# EAGLE board CT_schematic (EAGLE 7.6.0)

Size 100 x 80 mm. Coordinates in mm from the lower left corner, seen from the top.
Outline: 0,0 100,0 100,80 0,80 0,0
Copper layers (1*16): Top 0.035mm / dielectric 1.5mm / Bottom 0.035mm
Design rules "default": minimum track width 10mil, minimum drill 24mil, track to track 8mil, track to pad 8mil, pad to pad 8mil, via to via 8mil, smd to smd 8mil, copper to edge 40mil, drill to drill 8mil, minimum pad ring 10mil, minimum via ring 8mil, stop-mask expansion 4mil, vias tented up to drill 0mil, thermal gap 10mil

## Footprints (pad centres in the part's own frame; a part is rotated, then mirrored left to right if it is on the bottom)
C0603 = smd 0.8 x 0.8: 1 -0.762,0; 2 0.762,0
C0402 = smd 0.5 x 0.5: 1 -0.508,0; 2 0.508,0
C1210 = smd 1.2 x 2.5: 1 -1.524,0; 2 1.524,0
C1206 = smd 1.3 x 1.6: 1 -1.524,0; 2 1.524,0
EXV-9H = smd 3.505 x 1.676: 1 -2.857,0; 2 2.857,0
L0603 = smd 0.8 x 0.8: 1 -0.762,0; 2 0.762,0
R0603 = smd 0.8 x 0.8: 1 -0.762,0; 2 0.762,0
DR1040 = smd 1.6 x 3.2: 1 -4.458,0; 2 4.458,0
PJ-037B_PACKAGE = drill 3.7 square: 1 12,0 | drill 3.2 square: 2 6,0
LQFP100 = smd 0.3 x 1.2: 1 -6,-7.75; 2 -5.5,-7.75; 3 -5,-7.75; 4 -4.5,-7.75; 5 -4,-7.75; 6 -3.5,-7.75; 7 -3,-7.75; 8 -2.5,-7.75; 9 -2,-7.75; 10 -1.5,-7.75; 11 -1,-7.75; 12 -0.5,-7.75; 13 0,-7.75; 14 0.5,-7.75; 15 1,-7.75; 16 1.5,-7.75; 17 2,-7.75; 18 2.5,-7.75; 19 3,-7.75; 20 3.5,-7.75; 21 4,-7.75; 22 4.5,-7.75; 23 5,-7.75; 24 5.5,-7.75; 25 6,-7.75; 51 6,7.75; 52 5.5,7.75; 53 5,7.75; 54 4.5,7.75; 55 4,7.75; 56 3.5,7.75; 57 3,7.75; 58 2.5,7.75; 59 2,7.75; 60 1.5,7.75; 61 1,7.75; 62 0.5,7.75; 63 0,7.75; 64 -0.5,7.75; 65 -1,7.75; 66 -1.5,7.75; 67 -2,7.75; 68 -2.5,7.75; 69 -3,7.75; 70 -3.5,7.75; 71 -4,7.75; 72 -4.5,7.75; 73 -5,7.75; 74 -5.5,7.75; 75 -6,7.75 | smd 1.2 x 0.3: 26 7.75,-6; 27 7.75,-5.5; 28 7.75,-5; 29 7.75,-4.5; 30 7.75,-4; 31 7.75,-3.5; 32 7.75,-3; 33 7.75,-2.5; 34 7.75,-2; 35 7.75,-1.5; 36 7.75,-1; 37 7.75,-0.5; 38 7.75,0; 39 7.75,0.5; 40 7.75,1; 41 7.75,1.5; 42 7.75,2; 43 7.75,2.5; 44 7.75,3; 45 7.75,3.5; 46 7.75,4; 47 7.75,4.5; 48 7.75,5; 49 7.75,5.5; 50 7.75,6; 76 -7.75,6; 77 -7.75,5.5; 78 -7.75,5; 79 -7.75,4.5; 80 -7.75,4; 81 -7.75,3.5; 82 -7.75,3; 83 -7.75,2.5; 84 -7.75,2; 85 -7.75,1.5; 86 -7.75,1; 87 -7.75,0.5; 88 -7.75,0; 89 -7.75,-0.5; 90 -7.75,-1; 91 -7.75,-1.5; 92 -7.75,-2; 93 -7.75,-2.5; 94 -7.75,-3; 95 -7.75,-3.5; 96 -7.75,-4; 97 -7.75,-4.5; 98 -7.75,-5; 99 -7.75,-5.5; 100 -7.75,-6
ARDUCAM = drill 1 pad 1.8 square: 1 0,0 | drill 1 pad 1.8: 2 0,2.54; 3 2.54,0; 4 2.54,2.54; 5 5.08,0; 6 5.08,2.54; 7 7.62,0; 8 7.62,2.54; 9 10.16,0; 10 10.16,2.54; 11 12.7,0; 12 12.7,2.54; 13 15.24,0; 14 15.24,2.54; 15 17.78,0; 16 17.78,2.54; 17 20.32,0; 18 20.32,2.54; 19 22.86,0; 20 22.86,2.54
AT24C02D = smd 1.6 x 0.6: 1 -2.475,1.905 | smd 1.55 x 0.6: 2 -2.475,0.635; 3 -2.475,-0.635; 4 -2.475,-1.905; 5 2.475,-1.905; 6 2.475,-0.635; 7 2.475,0.635; 8 2.475,1.905
SOT-23-8 = smd 0.4 x 1.2: 1 -0.975,-1.3; 2 -0.325,-1.3; 3 0.325,-1.3; 4 0.975,-1.3; 5 0.975,1.3; 6 0.325,1.3; 7 -0.325,1.3; 8 -0.975,1.3
182-009-MALE = drill 1.194 pad 1.524 octagon: 1 -5.537,10.923; 2 -2.769,10.923; 3 0,10.923; 4 2.769,10.923; 5 5.537,10.923; 6 -4.153,8.08; 7 -1.384,8.08; 8 1.384,8.08; 9 4.153,8.08 | hole 3.048: -12.446,9.501; 12.446,9.501
RTL8201FL-VB-CG = smd 0.27 x 1: 1 0,0; 2 0.5,0; 3 1,0; 4 1.5,0; 5 2,0; 6 2.5,0; 7 3,0; 8 3.5,0; 9 4,0; 10 4.5,0; 11 5,0; 12 5.5,0; 25 5.5,8; 26 5,8; 27 4.5,8; 28 4,8; 29 3.5,8; 30 3,8; 31 2.5,8; 32 2,8; 33 1.5,8; 34 1,8; 35 0.5,8; 36 0,8 | smd 1 x 0.27: 13 6.75,1.25; 14 6.75,1.75; 15 6.75,2.25; 16 6.75,2.75; 17 6.75,3.25; 18 6.75,3.75; 19 6.75,4.25; 20 6.75,4.75; 21 6.75,5.25; 22 6.75,5.75; 23 6.75,6.25; 24 6.75,6.75; 37 -1.25,6.75; 38 -1.25,6.25; 39 -1.25,5.75; 40 -1.25,5.25; 41 -1.25,4.75; 42 -1.25,4.25; 43 -1.25,3.75; 44 -1.25,3.25; 45 -1.25,2.75; 46 -1.25,2.25; 47 -1.25,1.75; 48 -1.25,1.25
7498011122R = smd 0.71 x 2.29: 1 -3.545,-3.18; 2 -2.525,-3.18; 3 -1.505,-3.18; 4 -0.485,-3.18; 5 0.535,-3.18; 6 1.555,-3.18; 8 3.595,-3.18; 9 5.635,-3.18; 10 6.655,-3.18; 11 -6.605,-3.18; 12 -5.585,-3.18 | smd 1.4 x 2.54: 13 -8.51,10.2; 14 8.51,10.2 | hole 1.4: -3.5,0; 3.5,0
QFN65P400X400X100-17N = smd 1.016 x 0.356: 1 -1.803,0.965; 2 -1.803,0.33; 3 -1.803,-0.33; 4 -1.803,-0.965; 9 1.803,-0.965; 10 1.803,-0.33; 11 1.803,0.33; 12 1.803,0.965 | smd 0.356 x 1.016: 5 -0.965,-1.803; 6 -0.33,-1.803; 7 0.33,-1.803; 8 0.965,-1.803; 13 0.965,1.803; 14 0.33,1.803; 15 -0.33,1.803; 16 -0.965,1.803 | smd 2.108 x 2.108: 17 0,0
HTSS-105-01-G-D = drill 1 pad 1.8 square: 1 0,0 | drill 1 pad 1.8: 2 0,2.54; 3 2.54,0; 4 2.54,2.54; 5 5.08,0; 6 5.08,2.54; 7 7.62,0; 8 7.62,2.54; 9 10.16,0; 10 10.16,2.54
ABLS-25.000MHZ-B2F-T = smd 5.6 x 2.8: 1 -3.81,0; 2 5.69,0
ASEK = smd 1.4 x 1: 1 -1.1,-0.8; 2 1.1,-0.8; 3 1.1,0.8; 4 -1.1,0.8
ASFL1 = smd 1.7 x 1.5: 1 -1.27,-1.1; 2 1.27,-1.1; 3 1.27,1.1; 4 -1.27,1.1
IDT74FCT38072 = smd 0.51 x 1: 1 0,0; 2 1.27,0; 3 2.54,0; 4 3.81,0; 5 3.81,4.95; 6 2.54,4.95; 7 1.27,4.95; 8 0,4.95
HTSSOP14 = smd 1.676 x 0.356: 1 -2.8,1.95; 2 -2.8,1.3; 3 -2.8,0.65; 4 -2.8,0; 5 -2.8,-0.65; 6 -2.8,-1.3; 7 -2.8,-1.95; 8 2.8,-1.95; 9 2.8,-1.3; 10 2.8,-0.65; 11 2.8,0; 12 2.8,0.65; 13 2.8,1.3; 14 2.8,1.95 | smd 3 x 5: 15 0,0 | drill 0.4 pad 0.45: P$1 -0.75,1.5; P$2 0.75,1.5; P$3 -0.75,0; P$4 0.8,0; P$5 -0.75,-1.5; P$6 0.9,-1.5
SON-6 = smd 0.55 x 0.3: 1 -0.355,0.5 | smd 0.52 x 0.3: 2 -0.37,0; 3 -0.37,-0.5; 4 0.37,-0.5; 5 0.37,0; 6 0.37,0.5
SW_4-1437565-2 = smd 1.4 x 2.1: 1 -2.23,4.55; 2 -2.23,-4.55; 3 2.23,4.55; 4 2.23,-4.55
LGM67K-G1J2-24-Z = smd 0.8 x 1.4: A -2,0; C 0,0
NC7SZ125M5X = smd 1.3 x 0.7: 1 -1.3,0.95; 2 -1.3,0; 3 -1.3,-0.95; 4 1.3,-0.95; 5 1.3,0.95

## Placement (x,y rotation side)
C1  1e-06  [C0603]  -15.24,86.36 0 top  (outside the outline)
C2  1e-07  [C0603]  -19.05,86.36 0 top  (outside the outline)
C3  1e-07  [C0603]  -22.86,86.36 0 top  (outside the outline)
C4  1e-07  [C0603]  -26.67,86.36 0 top  (outside the outline)
C5  1e-07  [C0603]  -30.48,86.36 0 top  (outside the outline)
C6  1e-07  [C0603]  -34.29,86.36 0 top  (outside the outline)
C7  1e-07  [C0603]  -38.1,86.36 0 top  (outside the outline)
C8  4.7e-06  [C0603]  -80.01,81.28 0 top  (outside the outline)
C9  2.2e-06  [C0603]  -83.82,81.28 0 top  (outside the outline)
C10  2.2e-06  [C0603]  -87.63,81.28 0 top  (outside the outline)
C11  1e-08  [C0603]  -41.91,86.36 0 top  (outside the outline)
C12  1e-06  [C0603]  -45.72,86.36 0 top  (outside the outline)
C13  1e-06  [C0603]  -49.53,86.36 0 top  (outside the outline)
C14  1e-08  [C0402]  -77.47,91.44 0 top  (outside the outline)
C15  1e-07  [C0402]  -81.28,91.44 0 top  (outside the outline)
C16  2.2e-08  [C0402]  -62.23,91.44 0 top  (outside the outline)
C17  1e-06  [C0603]  -53.34,86.36 0 top  (outside the outline)
C18  1e-07  [C0402]  -85.09,91.44 0 top  (outside the outline)
C19  1e-08  [C0402]  -88.9,91.44 0 top  (outside the outline)
C20  1e-06  [C0603]  -57.15,86.36 0 top  (outside the outline)
C21  1e-07  [C0402]  -15.24,96.52 0 top  (outside the outline)
C22  1e-08  [C0402]  -19.05,96.52 0 top  (outside the outline)
C23  1e-07  [C0402]  -22.86,96.52 0 top  (outside the outline)
C24  1e-07  [C0402]  -26.67,96.52 0 top  (outside the outline)
C25  2.7e-11  [C0402]  -66.04,91.44 0 top  (outside the outline)
C26  2.7e-11  [C0402]  -69.85,91.44 0 top  (outside the outline)
C27  1e-07  [C0402]  -30.48,96.52 0 top  (outside the outline)
C28  1e-06  [C0603]  -60.96,86.36 0 top  (outside the outline)
C29  1e-08  [C0402]  -34.29,96.52 0 top  (outside the outline)
C30  1e-08  [C0402]  -38.1,96.52 0 top  (outside the outline)
C31  1e-08  [C0402]  -41.91,96.52 0 top  (outside the outline)
C32  1e-06  [C0603]  -64.77,86.36 0 top  (outside the outline)
C33  3.3e-09  [C0402]  -73.66,91.44 0 top  (outside the outline)
C34  1e-07  [C0402]  -45.72,96.52 0 top  (outside the outline)
C35  2.2e-05  [C1210]  -88.9,67.31 0 top  (outside the outline)
C36  2.2e-05  [C1210]  -16.51,74.93 0 top  (outside the outline)
C37  1e-05  [C1206]  -22.86,74.93 0 top  (outside the outline)
C38  1e-05  [C1206]  -29.21,74.93 0 top  (outside the outline)
C39  1e-07  [C0402]  -49.53,96.52 0 top  (outside the outline)
C40  0.0001  [EXV-9H]  -55.88,59.69 0 top  (outside the outline)
C41  0.0001  [EXV-9H]  -67.31,59.69 0 top  (outside the outline)
C42  1e-08  [C0402]  -53.34,96.52 0 top  (outside the outline)
C43  1e-08  [C0402]  -57.15,96.52 0 top  (outside the outline)
C44  1e-08  [C0402]  -60.96,96.52 0 top  (outside the outline)
F1  240.0  [L0603]  -68.58,86.36 0 top  (outside the outline)
I1  97.0  [R0603]  -72.39,86.36 0 top  (outside the outline)
I5  5.2e-06  [DR1040]  -19.05,49.53 0 top  (outside the outline)
J1  PJ-037B  [PJ-037B_PACKAGE]  -71.12,35.56 0 top  (outside the outline)
R2  1000.0  [R0603]  -76.2,86.36 0 top  (outside the outline)
R4  4700.0  [R0603]  -80.01,86.36 0 top  (outside the outline)
R5  4700.0  [R0603]  -83.82,86.36 0 top  (outside the outline)
R6  4700.0  [R0603]  -87.63,86.36 0 top  (outside the outline)
R7  2200.0  [R0603]  -15.24,91.44 0 top  (outside the outline)
R8  2200.0  [R0603]  -19.05,91.44 0 top  (outside the outline)
R9  2200.0  [R0603]  -22.86,91.44 0 top  (outside the outline)
R10  2200.0  [R0603]  -26.67,91.44 0 top  (outside the outline)
R11  10000.0  [R0603]  -77.47,74.93 0 top  (outside the outline)
R12  10000.0  [R0603]  -82.55,74.93 0 top  (outside the outline)
R13  10000.0  [R0603]  -87.63,74.93 0 top  (outside the outline)
R14  10000.0  [R0603]  -15.24,81.28 0 top  (outside the outline)
R15  10000.0  [R0603]  -20.32,81.28 0 top  (outside the outline)
R16  120.0  [R0603]  -30.48,91.44 0 top  (outside the outline)
R17  0.1  [R0603]  -34.29,91.44 0 top  (outside the outline)
R18  0.1  [R0603]  -38.1,91.44 0 top  (outside the outline)
R19  200.0  [R0603]  -41.91,91.44 0 top  (outside the outline)
R20  200.0  [R0603]  -45.72,91.44 0 top  (outside the outline)
R21  2490.0  [R0603]  -49.53,91.44 0 top  (outside the outline)
R22  4700.0  [R0603]  -53.34,91.44 0 top  (outside the outline)
R23  10000.0  [R0603]  -25.4,81.28 0 top  (outside the outline)
R24  10000.0  [R0603]  -30.48,81.28 0 top  (outside the outline)
R25  10000.0  [R0603]  -35.56,81.28 0 top  (outside the outline)
R26  10000.0  [R0603]  -40.64,81.28 0 top  (outside the outline)
R27  10000.0  [R0603]  -45.72,81.28 0 top  (outside the outline)
R28  10000.0  [R0603]  -50.8,81.28 0 top  (outside the outline)
R29  10000.0  [R0603]  -55.88,81.28 0 top  (outside the outline)
R30  10000.0  [R0603]  -60.96,81.28 0 top  (outside the outline)
R31  71007.101651032  [R0603]  -62.23,74.93 0 top  (outside the outline)
R32  22000.0  [R0603]  -66.04,81.28 0 top  (outside the outline)
R33  10000.0  [R0603]  -71.12,81.28 0 top  (outside the outline)
R34  10000.0  [R0603]  -76.2,81.28 0 top  (outside the outline)
R35  9100.0  [R0603]  -57.15,91.44 0 top  (outside the outline)
R36  680000.0  [R0603]  -67.31,74.93 0 top  (outside the outline)
R37  120000.0  [R0603]  -72.39,74.93 0 top  (outside the outline)
U1  STM32F745VET6  [LQFP100]  -82.55,8.89 0 top  (outside the outline)
U2  arducam_ov2640  [ARDUCAM]  -60.96,66.04 0 top  (outside the outline)
U3  AT24C02D-SSHM-T  [AT24C02D]  -55.88,48.26 0 top  (outside the outline)
U4  MAX3051EKA+T  [SOT-23-8]  -34.29,74.93 0 top  (outside the outline)
U5  182-009-113R531  [182-009-MALE]  -55.88,6.35 0 top  (outside the outline)
U6  RTL8201FL-VB-CG  [RTL8201FL-VB-CG]  -54.61,31.75 0 top  (outside the outline)
U7  7498011122R  [7498011122R]  -22.86,7.62 0 top  (outside the outline)
U8  TSC2008TRGVRQ1  [QFN65P400X400X100-17N]  -35.56,35.56 0 top  (outside the outline)
U9  HTSS-105-01-G-D  [HTSS-105-01-G-D]  -39.37,46.99 0 top  (outside the outline)
U10  ABLS-25.000MHZ-B2F-T  [ABLS-25.000MHZ-B2F-T]  -26.67,68.58 0 top  (outside the outline)
U11  ASEK-32.768KHz-ECST  [ASEK]  -46.99,59.69 0 top  (outside the outline)
U12  ASFL1-25MHZ-NCS  [ASFL1]  -73.66,48.26 0 top  (outside the outline)
U13  idt74fct38072  [IDT74FCT38072]  -29.21,57.15 0 top  (outside the outline)
U14  tps54325PWP  [HTSSOP14]  -68.58,67.31 0 top  (outside the outline)
U15  TPS3895ADRYR  [SON-6]  -63.5,95.25 0 top  (outside the outline)
U16  4-1437565-2  [SW_4-1437565-2]  -87.63,34.29 0 top  (outside the outline)
U17  Q65110A2395  [LGM67K-G1J2-24-Z]  -77.47,67.31 0 top  (outside the outline)
U18  nc7sz125m5x  [NC7SZ125M5X]  -39.37,74.93 0 top  (outside the outline)
U19  nc7sz125m5x  [NC7SZ125M5X]  -45.72,74.93 0 top  (outside the outline)
U20  nc7sz125m5x  [NC7SZ125M5X]  -52.07,74.93 0 top  (outside the outline)

## Library data of the parts
C1-C44 F1 I1 I5 J1 R2 R4-R37 U1-U20 = circuit_tree

## Nets
CLK_CRYSTAL_U6_42: C26.1 U6.42 U10.1
CLK_CRYSTAL_U6_43: C25.1 U6.43 U10.2
CLK_U1_8: U1.8 U11.3
CLK_U1_12: U1.12 U13.6
CLK_U2_8: U2.8 U13.7
CLK_U13_3: U12.3 U13.3
GND: C1.2 C2.2 C3.2 C4.2 C5.2 C6.2 C7.2 C8.2 C9.2 C10.2 C11.2 C12.2 C13.2 C14.2 C15.2 C16.2 C17.2 C18.2 C19.2 C20.2 C21.2 C22.2 C23.2 C24.2 C25.2 C26.2 C27.2 C28.2 C29.2 C30.2 C31.2 C32.2 C33.2 C35.2 C36.2 C37.2 C38.2 C39.2 C40.2 C41.2 C42.2 C43.2 C44.2 J1.2 R2.2 R11.2 R12.2 R14.2 R15.2 R17.2 R18.2 R21.2 R23.2 R24.2 R26.2 R32.2 R35.2 R37.2 U1.10 U1.19 U1.26 U1.49 U1.74 U1.99 U2.2 U2.20 U3.4 U4.2 U4.8 U5.5 U6.7 U6.20 U6.33 U6.47 U7.9 U8.10 U8.12 U8.17 U9.9 U11.2 U12.2 U13.4 U13.5 U13.8 U14.5 U14.8 U14.9 U14.15 U15.2 U17.C U18.1 U18.3 U19.1 U19.3 U20.1 U20.3
NET_U1_14: R5.1 U1.14 U19.4
NET_U1_16: R9.1 U1.16 U6.30
NET_U1_21: C11.1 C12.1 F1.1 U1.20 U1.21
NET_U1_24: R10.1 U1.24 U6.31
NET_U1_48: C9.1 U1.48
NET_U1_73: C10.1 U1.73
NET_U1_92: R7.1 U1.92 U3.6
NET_U1_94: R11.1 U1.94
NET_U1_96: R8.1 U1.96 U3.5
NET_U1_97: U17.A
NET_U1_98: U16.3 U16.4
NET_U2_19: R6.1 U2.19 U20.4
NET_U3_1: R13.1 U3.1
NET_U3_2: R14.1 U3.2
NET_U3_3: R15.1 U3.3
NET_U3_7: R12.1 U3.7
NET_U4_6: R16.2 U4.6
NET_U5_2: R16.2 U4.6 U5.2
NET_U5_3: R16.1 U4.7 U5.3
NET_U6_6: C17.1 C18.1 C19.1 I1.1 U6.6 U6.41
NET_U6_10: R26.1 U6.10
NET_U6_28: U6.28
NET_U6_29: R4.1 U6.29 U18.4
NET_U6_32: R22.1 U6.32
NET_U6_34: R24.1 U6.34
NET_U6_35: R25.1 U6.35
NET_U6_40: C24.1 U6.40
NET_U6_46: R21.1 U6.46
NET_U6_48: C23.1 U6.48
NET_U7_1: U6.1 U7.1
NET_U7_3: U6.2 U7.3
NET_U7_4: U6.4 U7.4
NET_U7_5: C16.1 U7.2 U7.5
NET_U7_6: U6.5 U7.6
NET_U7_8: R18.1 U7.8
NET_U7_10: R19.1 U7.10
NET_U7_12: R20.1 U7.12
NET_U7_13: R17.1 U7.13 U7.14
NET_U7_34: R19.2
NET_U7_35: R20.2
NET_U8_15: R30.1 U8.15
NET_U9_3: U8.7 U9.3
NET_U9_4: U8.9 U9.4
NET_U9_5: U8.6 U9.5
NET_U9_6: U8.8 U9.6
NET_U14_2: R31.2 R32.1 U14.2
NET_U14_3: C32.1 U14.3
NET_U14_4: C33.1 U14.4
NET_U14_10: C34.1 I5.1 U14.10 U14.11
NET_U14_12: C34.2 U14.12
NET_U15_1: R34.1 R35.1 U15.1
NET_U15_3: R36.2 R37.1 U15.3
NET_U15_4: R33.1 U15.4 U18.2 U19.2 U20.2
NET_U16_1: R2.1 U16.1 U16.2
PROC_CAN1_RX: U1.70 U4.4
PROC_CAN1_TX: U1.71 U4.1
PROC_DCMI_D0: U1.63 U2.18
PROC_DCMI_D1: U1.64 U2.17
PROC_DCMI_D2: U1.65 U2.16
PROC_DCMI_D3: U1.66 U2.15
PROC_DCMI_D4: U1.3 U2.14
PROC_DCMI_D5: U1.84 U2.13
PROC_DCMI_D6: U1.4 U2.12
PROC_DCMI_D7: U1.5 U2.11
PROC_DCMI_D8: U1.78 U2.10
PROC_DCMI_D9: U1.80 U2.9
PROC_DCMI_HSYNC: U1.28 U2.6
PROC_DCMI_PIXCLK: U1.30 U2.7
PROC_DCMI_VSYNC: U1.93 U2.5
PROC_ETH_COL: U1.25 U6.38
PROC_ETH_CRS: U1.22 U6.36
PROC_ETH_RX_CLK: U1.23 U6.19
PROC_ETH_RX_DV: R23.1 U1.31 U6.13
PROC_ETH_RX_ER: R28.1 U6.39
PROC_ETH_RXD0: U1.32 U6.14
PROC_ETH_RXD1: U1.33 U6.16
PROC_ETH_RXD2: U1.34 U6.17
PROC_ETH_RXD3: R27.1 U6.18
PROC_ETH_TX_CLK: U1.18 U6.22
PROC_ETH_TX_EN: U6.27
PROC_ETH_TXD0: U6.23
PROC_ETH_TXD1: U6.24
PROC_ETH_TXD2: U1.17 U6.25
PROC_ETH_TXD3: U1.1 U6.26
PROC_SPI1_MISO: U1.90 U8.16
PROC_SPI1_MOSI: U1.91 U8.2
PROC_SPI1_NSS: R29.1 U1.77 U8.3
PROC_SPI1_SCK: U1.29 U8.4
VCC_S1_8V9: C37.1 C38.1 C40.1 C41.1 J1.1 U14.7 U14.13 U14.14
VCC_TIER1_3V3: C1.1 C2.1 C3.1 C4.1 C5.1 C6.1 C7.1 C8.1 C13.1 C14.1 C15.1 C20.1 C21.1 C22.1 C27.1 C28.1 C29.1 C30.1 C31.1 C35.1 C36.1 C39.1 C42.1 C43.1 C44.1 F1.2 I1.2 I5.2 R4.2 R5.2 R6.2 R7.2 R8.2 R9.2 R10.2 R13.2 R22.2 R25.2 R27.2 R28.2 R29.2 R30.2 R31.1 R33.2 R34.2 R36.1 U1.6 U1.11 U1.27 U1.50 U1.75 U1.100 U2.1 U3.8 U4.3 U6.15 U6.21 U6.37 U8.5 U11.4 U12.4 U13.1 U13.2 U14.1 U15.6 U18.5 U19.5 U20.5

## Tracks (layer width: path | path; a pad name or v marks a point on that pad's centre or on a via)
CLK_CRYSTAL_U6_42  (2 unrouted)
CLK_CRYSTAL_U6_43  (2 unrouted)
CLK_U1_8  (1 unrouted)
CLK_U1_12  (1 unrouted)
CLK_U2_8  (1 unrouted)
CLK_U13_3  (1 unrouted)
GND  (95 unrouted)
NET_U1_14  (2 unrouted)
NET_U1_16  (2 unrouted)
NET_U1_21  (4 unrouted)
NET_U1_24  (2 unrouted)
NET_U1_48  (1 unrouted)
NET_U1_73  (1 unrouted)
NET_U1_92  (2 unrouted)
NET_U1_94  (1 unrouted)
NET_U1_96  (2 unrouted)
NET_U1_98  (1 unrouted)
NET_U2_19  (2 unrouted)
NET_U3_1  (1 unrouted)
NET_U3_2  (1 unrouted)
NET_U3_3  (1 unrouted)
NET_U3_7  (1 unrouted)
NET_U4_6  (1 unrouted)
NET_U5_2  (2 unrouted)
NET_U5_3  (2 unrouted)
NET_U6_6  (5 unrouted)
NET_U6_10  (1 unrouted)
NET_U6_29  (2 unrouted)
NET_U6_32  (1 unrouted)
NET_U6_34  (1 unrouted)
NET_U6_35  (1 unrouted)
NET_U6_40  (1 unrouted)
NET_U6_46  (1 unrouted)
NET_U6_48  (1 unrouted)
NET_U7_1  (1 unrouted)
NET_U7_3  (1 unrouted)
NET_U7_4  (1 unrouted)
NET_U7_5  (2 unrouted)
NET_U7_6  (1 unrouted)
NET_U7_8  (1 unrouted)
NET_U7_10  (1 unrouted)
NET_U7_12  (1 unrouted)
NET_U7_13  (2 unrouted)
NET_U8_15  (1 unrouted)
NET_U9_3  (1 unrouted)
NET_U9_4  (1 unrouted)
NET_U9_5  (1 unrouted)
NET_U9_6  (1 unrouted)
NET_U14_2  (2 unrouted)
NET_U14_3  (1 unrouted)
NET_U14_4  (1 unrouted)
NET_U14_10  (3 unrouted)
NET_U14_12  (1 unrouted)
NET_U15_1  (2 unrouted)
NET_U15_3  (2 unrouted)
NET_U15_4  (4 unrouted)
NET_U16_1  (2 unrouted)
PROC_CAN1_RX  (1 unrouted)
PROC_CAN1_TX  (1 unrouted)
PROC_DCMI_D0  (1 unrouted)
PROC_DCMI_D1  (1 unrouted)
PROC_DCMI_D2  (1 unrouted)
PROC_DCMI_D3  (1 unrouted)
PROC_DCMI_D4  (1 unrouted)
PROC_DCMI_D5  (1 unrouted)
PROC_DCMI_D6  (1 unrouted)
PROC_DCMI_D7  (1 unrouted)
PROC_DCMI_D8  (1 unrouted)
PROC_DCMI_D9  (1 unrouted)
PROC_DCMI_HSYNC  (1 unrouted)
PROC_DCMI_PIXCLK  (1 unrouted)
PROC_DCMI_VSYNC  (1 unrouted)
PROC_ETH_COL  (1 unrouted)
PROC_ETH_CRS  (1 unrouted)
PROC_ETH_RX_CLK  (1 unrouted)
PROC_ETH_RX_DV  (2 unrouted)
PROC_ETH_RX_ER  (1 unrouted)
PROC_ETH_RXD0  (1 unrouted)
PROC_ETH_RXD1  (1 unrouted)
PROC_ETH_RXD2  (1 unrouted)
PROC_ETH_RXD3  (1 unrouted)
PROC_ETH_TX_CLK  (1 unrouted)
PROC_ETH_TXD2  (1 unrouted)
PROC_ETH_TXD3  (1 unrouted)
PROC_SPI1_MISO  (1 unrouted)
PROC_SPI1_MOSI  (1 unrouted)
PROC_SPI1_NSS  (2 unrouted)
PROC_SPI1_SCK  (1 unrouted)
VCC_S1_8V9  (7 unrouted)
VCC_TIER1_3V3  (67 unrouted)